# Altium PCB project_13.PcbDoc
Units mil, origin at the board's own origin, x right, y up, seen from the top; angles counter-clockwise.
Board outline 2697.9 x 2392.9 mil, 2 copper layers (Top Layer, Bottom Layer); 18 components, 44 nets, 103 pads, 2 vias.
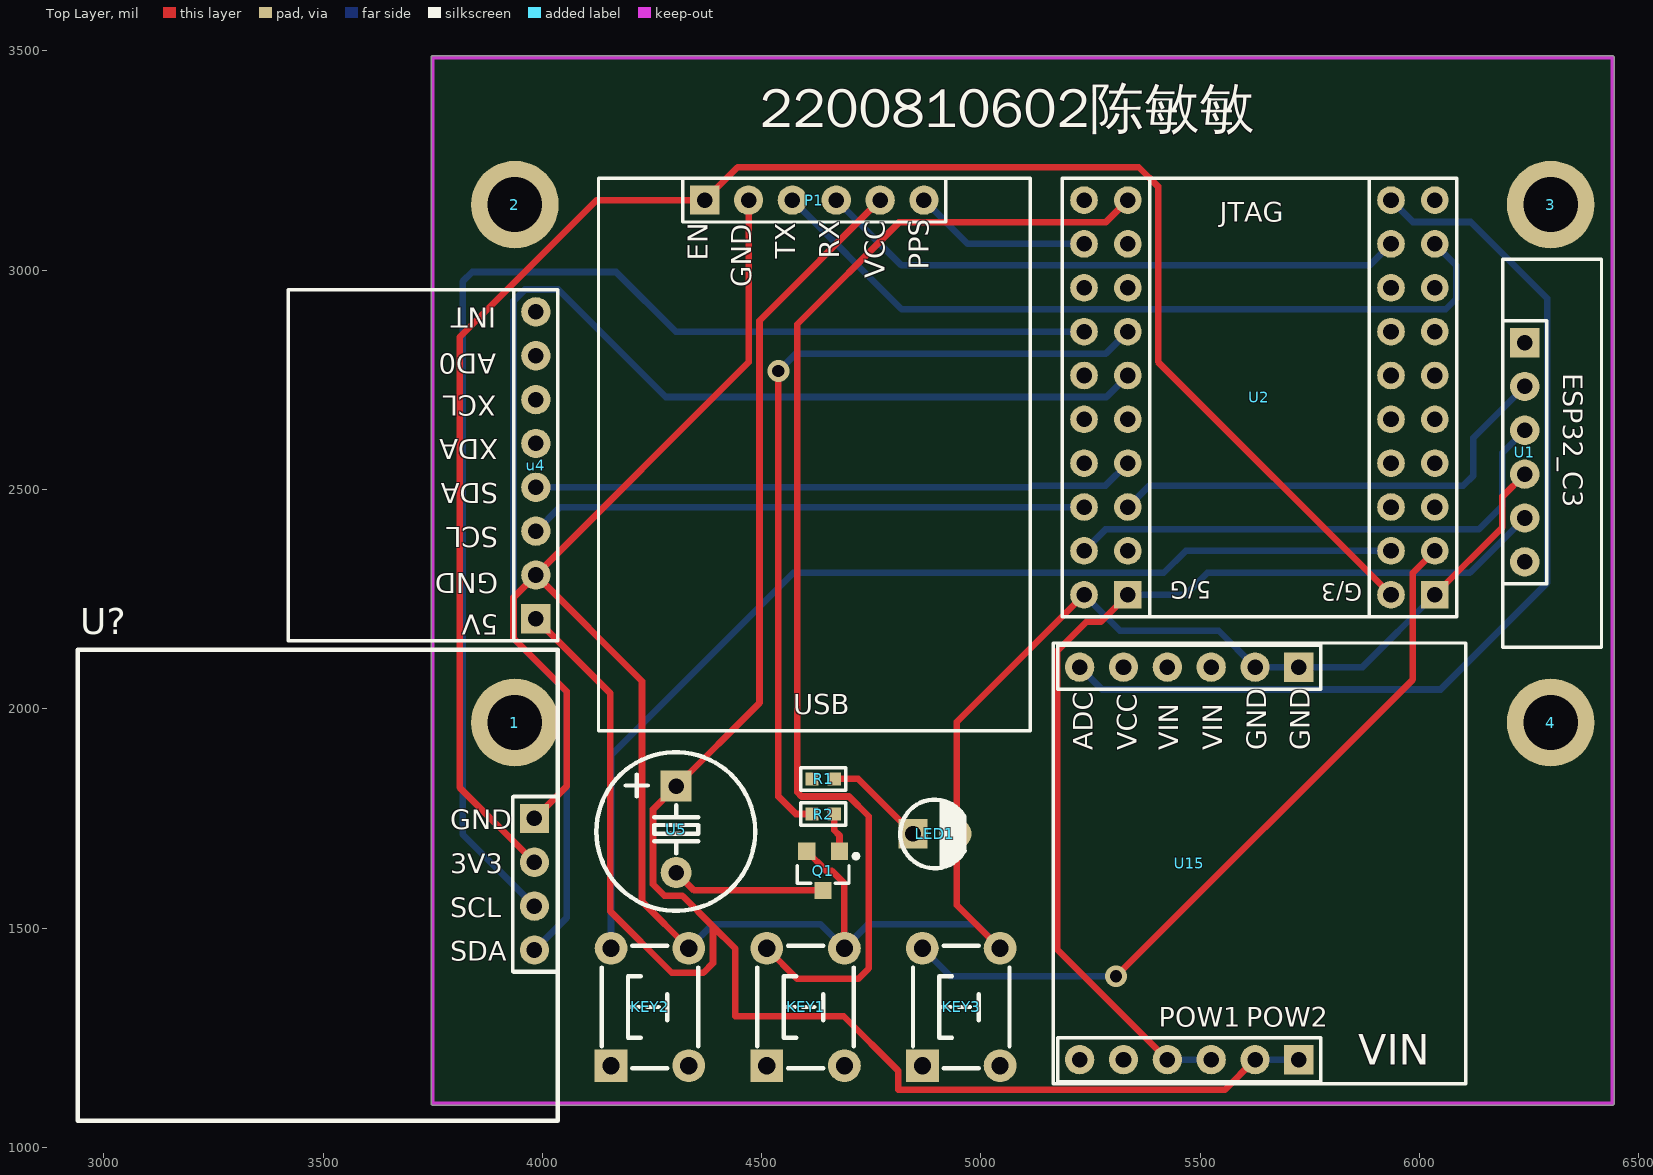
[diagram p0: Top Layer view]
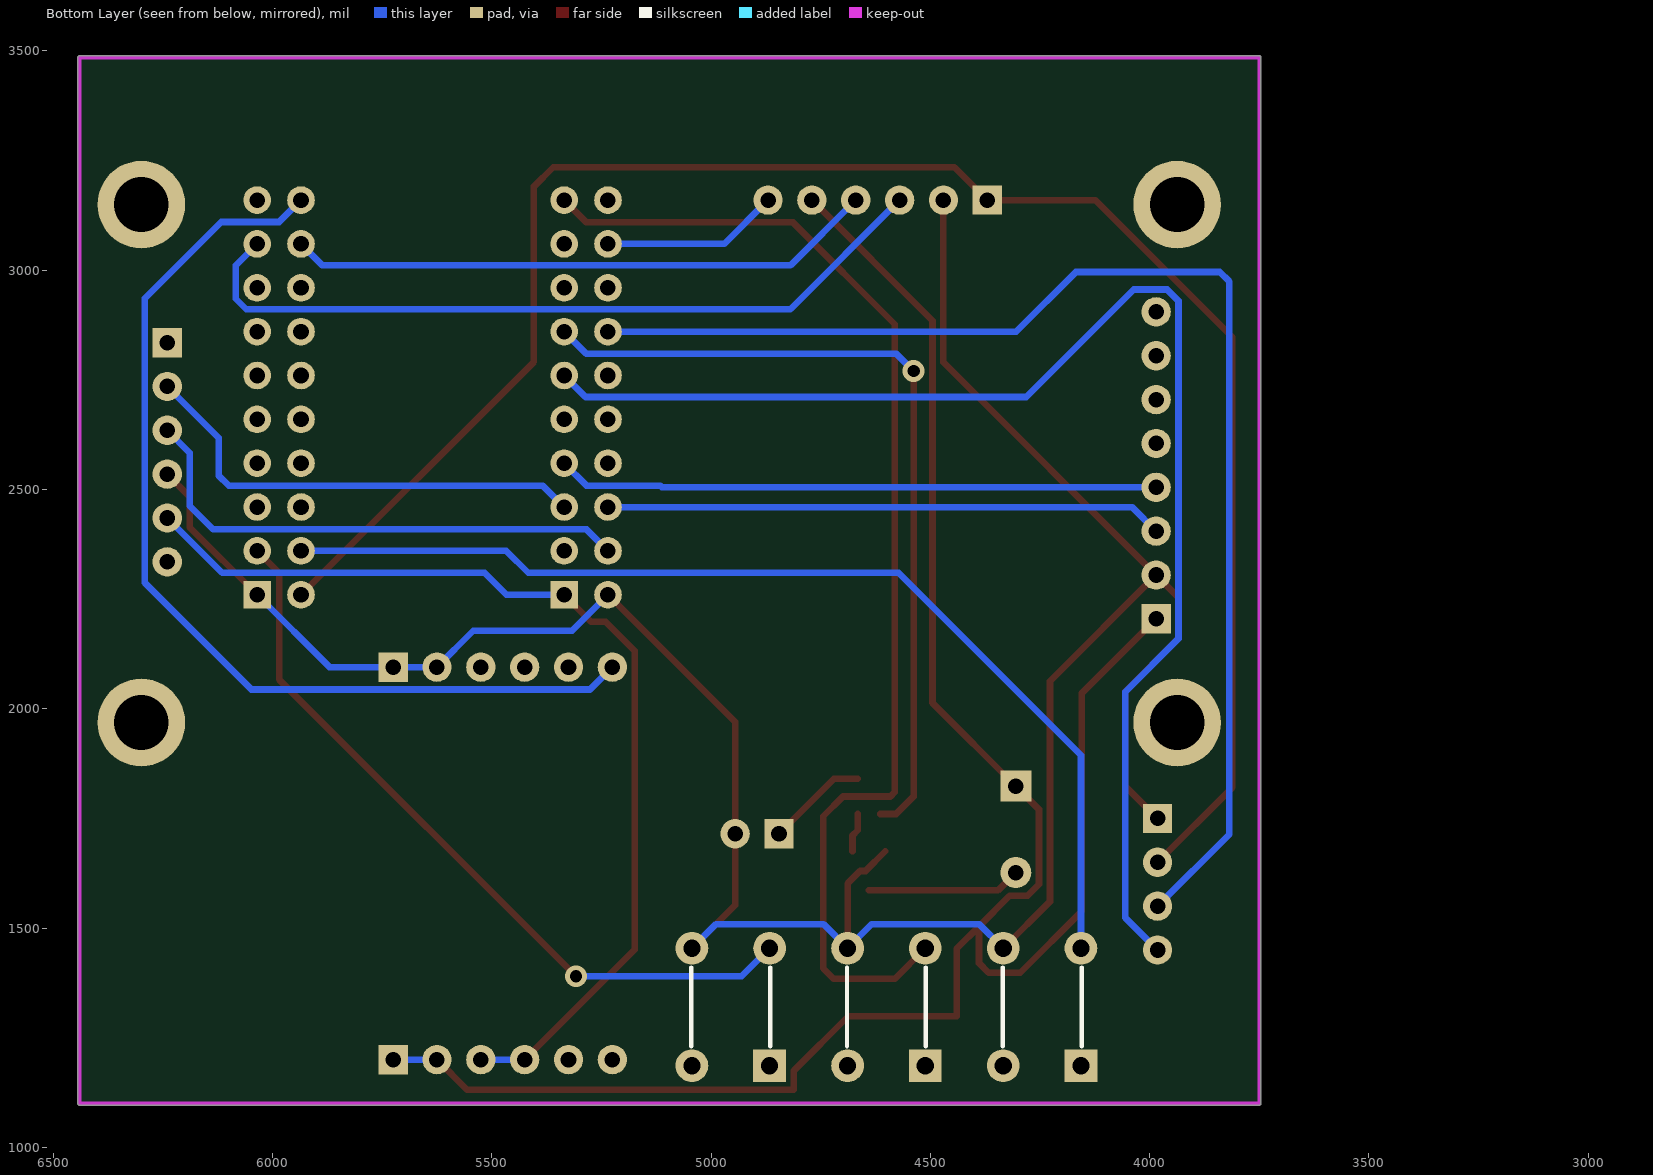
[diagram p1: Bottom Layer view, seen from below]

## Layer stack, top to bottom
Top Solder: solder mask 0.4, Solder Resist, Dk 3.5
Top Layer: signal copper 1.4
Dielectric 1: dielectric 12.6, FR-4, Dk 4.8
Bottom Layer: signal copper 1.4
Bottom Solder: solder mask 0.4, Solder Resist, Dk 3.5

## Board outline
3746.05,1100 ccw(c3750,1100) 3750,1096.05 6440,1096.05 ccw(c6440,1100) 6443.95,1100 6443.95,3485 ccw(c6440,3485) 6440,3488.95 3750,3488.95 ccw(c3750,3485) 3746.05,3485

## Design rules (kind name [scope] priority, off if disabled: settings)
Clearance [All] p1: gap=10 ignorepadtopadclearanceinfootprint=FALSE
PolygonConnect [All] p1: connectstyle=Relief reliefconductorwidth=10 reliefentries=4 polygonreliefangle="90 Angle" airgapwidth=10
RoutingVias [All] p1: holewidth=28 width=50 viastyle="Through Hole" minholewidth=28 minwidth=50 maxholewidth=28 maxwidth=50
SolderMaskExpansion [All] p1: expansion=4 istentingtop=FALSE
SupplyNets "Schematic Supply Nets_3" [InNet('5V_MCU')] p1: voltage=0.000
SupplyNets "Schematic Supply Nets_2" [InNet('3V3')] p2: voltage=0.000
SupplyNets "Schematic Supply Nets_1" [InNet('5V')] p3: voltage=0.000
SupplyNets "Schematic Supply Nets" [InNet('GND')] p4: voltage=0.000
Width [All] p1: maxlimit=100 minlimit=10 preferedwidth=15 minimp=50.000000 maximp=50.000000 favimp=50.000000
30 further rules are at their usual default settings.

## Components (designator, comment, footprint, x,y, rotation, side; value= is the part's Value field where it differs from the comment)
1 "M3" "M3 125X200" 3937.01,1968.5 r90 top
2 "M3" "M3 125X200" 3937.01,3149.61 r90 top
3 "M3" "M3 125X200" 6299.21,3149.61 r90 top
4 "M3" "M3 125X200" 6299.21,1968.5 r90 top
KEY1 "mod_buttom" MOD_BUTTOM 4600,1310 r90 top
KEY2 "mod_buttom" MOD_BUTTOM 4245,1310 r90 top
KEY3 "mod_buttom" MOD_BUTTOM 4955,1310 r90 top
LED1 "红色" "LED 3MM-R" 4895,1715 r0 top
P1 "port_6p" MOD_GPS 4622.37,3166.24 r0 top
Q1 "SS8050" SOT23-3L 4640,1630 r180 top
R1 "1K" "R 0603_L" 4640,1840 r0 top
R2 "1K" "R 0603_L" 4640,1760 r0 top
U1 "c3_hw_1" C3_HW_1 6240,2585 r270 top
U2 "f1_hw_1_gw" F1_HW_1_GW 5645,2725 r270 top
u4 "mod_mpu6050" MOD_MPU6050 3869.75,2380.98 r180 top
U5 "mod_buzzer" MOD_BUZZER 4300,1720 r90 top
U15 "pow_hw_3" POW_HW_3 5500,1760 r0 top
U? "mod_oled" mod_oled 3980,1595 r270 top

## Footprints (in the part's own frame and the unit in brackets; to place one, negate y for a bottom-side part, rotate by r counter-clockwise, add the part's x,y. Pads: shape width x height; smd on the part's side, far side on the other; paste and mask are expansions set on the pad)
C3_HW_1 [mm]
  rect 1.7x1.7 hole 0.9: 1(-6.35,0)
  round 1.7 hole 0.9: 2(-3.81,0) 3(-1.27,0) 4(1.27,0) 5(3.81,0) 6(6.35,0)
  silkscreen extent -11.18,-1.27 11.3,4.45, body extent -11.18,-1.27 11.3,4.45, height 8.5
F1_HW_1_GW [mm]
  rect 1.6x1.6 hole 0.9: 1(11.811,9.906) 21(11.811,-7.874)
  round 1.6 hole 0.9: 2(11.811,7.366) 3(9.271,9.906) 4(9.271,7.366) 5(6.731,9.906) 6(6.731,7.366) 7(4.191,9.906) 8(4.191,7.366) 9(1.651,9.906) 10(1.651,7.366) 11(-0.889,9.906) 12(-0.889,7.366) 13(-3.429,9.906) 14(-3.429,7.366) 15(-5.969,9.906) 16(-5.969,7.366) 17(-8.509,9.906) 18(-8.509,7.366) 19(-11.049,9.906) 20(-11.049,7.366) 22(11.811,-10.414) 23(9.271,-7.874) 24(9.271,-10.414) 25(6.731,-7.874) 26(6.731,-10.414) 27(4.191,-7.874) 28(4.191,-10.414) 29(1.651,-7.874) 30(1.651,-10.414) 31(-0.889,-7.874) 32(-0.889,-10.414) 33(-3.429,-7.874) 34(-3.429,-10.414) 35(-5.969,-7.874) 36(-5.969,-10.414) 37(-8.509,-7.874) 38(-8.509,-10.414) 39(-11.049,-7.874) 40(-11.049,-10.414)
  silkscreen extent -12.32,-11.68 13.08,11.18, body extent -12.38,-11.68 13.08,11.18, height 8.5
"LED 3MM-R" [mm] "红色3mm直插LED"
  rect 1.7x1.7 hole 0.9: 1(-1.27,0)
  round 1.7 hole 0.9: 2(1.27,0)
  silkscreen extent -2.01,-2 1.72,1.98, body extent -1.95,-1.95 1.64,1.95, height 5.55
"M3 125X200" [mil] "M3螺丝孔，孔125Mil，焊盘200Mil"
  round 200 hole 125: 1(0,0)
MOD_BUTTOM [mm]
  rect 1.9x1.9 hole 1: 1(-3.146,2.25)
  round 1.9 hole 1: 2(-3.146,-2.25) 3(3.654,-2.25) 4(3.654,2.25)
  silkscreen extent -3.3,-2.79 3.81,2.79, body extent -3.85,-3 4.36,3, height 4.25
MOD_BUZZER [mm] "有源蜂鸣器"
  rect 1.8x1.8 hole 0.9: 1(2.627,-0.127)
  round 1.8 hole 0.9: 2(-2.373,-0.127)
  silkscreen extent -4.6,-4.7 4.6,4.5, body extent -4.37,-4.63 4.63,4.37, height 5.45
MOD_GPS [mm] "GPS模块"
  rect 1.7x1.7 hole 0.9: 1(-6.41,-0.158)
  round 1.7 hole 0.9: 2(-3.87,-0.158) 3(-1.33,-0.158) 4(1.21,-0.158) 5(3.75,-0.158) 6(6.29,-0.158)
  silkscreen extent -12.56,-30.89 12.44,1.11, body extent -7.68,-1.43 7.56,1.11, height 8.5
MOD_MPU6050 [mm]
  rect 1.7x1.7 hole 0.9: 1(-2.927,4.47)
  round 1.7 hole 0.9: 2(-2.927,1.93) 3(-2.927,-0.61) 4(-2.927,-3.15) 5(-2.927,-5.69) 6(-2.927,-8.23) 7(-2.927,-10.77) 8(-2.927,-13.31)
  silkscreen extent -4.2,-14.61 11.41,5.74, body extent -4.2,-14.58 -1.66,5.74, height 8.5
mod_oled [mm] "外购屏幕模块接口"
  rect 1.7x1.7 hole 0.9: 1(-3.935,0.047)
  round 1.7 hole 0.9: 2(-1.395,0.047) 3(1.145,0.047) 4(3.685,0.047)
  silkscreen extent -13.72,-26.4 13.58,1.4, body extent -13.72,-26.42 13.59,1.4, height 8.5
POW_HW_3 [mm]
  round 1.7 hole 0.9: 0(3.175,8.509) 1(-1.905,8.509) 1(0.635,8.509) 2(-4.445,8.509) 3(-6.985,-14.224) 3(-4.445,-14.224) 4(3.175,-14.224) 5(-1.905,-14.224) 5(0.635,-14.224) 6(-6.985,8.509)
  rect 1.7x1.7 hole 0.9: 0(5.715,8.509) 4(5.715,-14.224)
  silkscreen extent -8.51,-15.62 15.37,9.91, body extent -8.51,-15.62 15.37,9.91, height 8.5
"R 0603_L" [mil] "1/10W贴片电阻"
  rect 30x30 smd: 1(-25.59,0) 2(25.59,0)
  silkscreen extent -51,-26 51,26, body extent -31,-16 32,16, height 16
SOT23-3L [mm] "3x1.3x1mm(长宽高)"
  rect 1x1 smd: 1(-0.95,-1.143) 2(0.95,-1.143) 3(0,1.125)
  silkscreen extent -2.03,-0.99 1.5,0.7, body extent -1.5,-1.2 1.5,1.2, height 1.05

## Part data
1 2 3 4: library part prot_m3, "m3铜柱孔", BOM名称=铜柱孔, 学习资源=www.ooocke.com, 版权归属=源创客
KEY1 KEY2 KEY3: "6*6*4.3按键"
LED1: library part LED-3MM, "插件LED", BOM名称=插件LED, 学习资源=www.ooocke.com, 版权归属=源创客
P1: "6P模块接口"
Q1: library part 8050-SMD, "高频放大-NPN型", BOM名称=高频放大-NPN型, 学习资源=www.ooocke.com, 属性="40V 1.5A 1W 100MHZ", 版权归属=源创客
R1 R2: library part R, "贴片电阻", BOM名称=贴片电阻, 学习资源=www.ooocke.com, 版权归属=源创客
U1: "ESP32C3蓝牙模块 / 6p排母"
u4: "陀螺仪模块"
U5: "有源蜂鸣器"
U15: "两路降压电源模块"
U?: "oled模块 / 4p排母"

## Via types
v1: diameter 50, hole 28, Top Layer to Bottom Layer, 2 vias

## Nets (pads, with @x,y where several pads share a name; then routed paths per layer and width w, separated by ;. In a path a pad name is that pad's centre, name@x,y a point inside that pad or via, vN(x,y) a via of type N, cw(c..) or ccw(c..) an arc to the next point about the centre after c; other vN are vias at no path point)
3V3: P1.1 U2.2 U?.2 | length 4190.7
  Top Layer w15: U?.2 3811,1820.76 3811,2847 4124,3160 P1.1 4445,3235 5360,3235 5404,3191 5404,2791 U2.2
5V: P1.5 u4.1 U5.1 U15.4 | length 4708.5
  Top Layer w15: u4.1 4155,2035 4155,1538 4295,1398 4367,1398 4389,1420 4389,1503.77 ; P1.5 4495,2885 4495,2013.43 U5.1 4252.07,1770.49 4252.07,1600 4278.43,1573.64 4319.13,1573.64 4389,1503.77 ; U15.4@5625,1200 5556,1131 4811,1131 4811,1175 4687,1299 4440,1299 4440,1452.77 4389,1503.77
  Bottom Layer w15: U15.4@5625,1200 U15.4@5725,1200
5V_MCU: U1.5 U2.21 U15.5 | length 2327.5
  Top Layer w15: U2.21 5273,2198 5240,2198 5174,2132 5174,1451 U15.5@5425,1200
  Bottom Layer w15: U2.21 5466.5,2260 5516.5,2310 6115,2310 U1.5 ; U15.5@5425,1200 U15.5@5525,1200
BOOT0: U2.35
GND: KEY1.3 KEY2.3 KEY3.3 LED1.2 P1.2 Q1.2 U1.4 U2.1 U2.22 u4.2 U15.0 U?.1 | length 6037.1
  Top Layer w15: U?.1 4055,1823.06 4055,2040 3934,2161 3934,2254 u4.2 ; KEY2.3 4227.07,1560.37 4227.07,2062.93 u4.2 ; P1.2 4470,2790 u4.2 ; Q1.2 4647.6,1630 4660,1630 4688.58,1601.42 KEY1.3 ; KEY3.3 4945,1552.44 LED1.2 4945,1970 U2.22 ; U2.1 6189,2414 6189,2484 U1.4
  Bottom Layer w15: KEY2.3 4388.72,1509 4633.44,1509 KEY1.3 4743.72,1509 4988.44,1509 KEY3.3 ; U2.22 5317,2178 5542,2178 5625,2095 5725,2095 5870,2095 U2.1
NetLED1_1: LED1.1 R1.2 | length 231.2
  Top Layer w15: R1.2 4720,1840 LED1.1
NetQ1_1: Q1.1 R2.2 | length 89.9
  Top Layer w15: R2.2 4665.59,1722.81 4677.4,1711 Q1.1
NetQ1_3: Q1.3 U5.2 | length 351.9
  Top Layer w15: U5.2 4345.87,1585.71 Q1.3
NRST: U2.12
PA0: U2.20 U15.6 | length 2285.6
  Bottom Layer w15: U15.6 5276,2044 6048,2044 6291,2287 6291,2936 6117,3110 5985,3110 U2.20
PA1: U2.19
PA2: P1.4 U2.18 | length 1347
  Bottom Layer w15: P1.4 4819,3011 5886,3011 U2.18
PA3: P1.3 U2.17 | length 1772.4
  Bottom Layer w15: P1.3 4819,2911 6060,2911 6084,2935 6084,3011 U2.17
PA4: U2.16
PA5: U2.15
PA6: U2.14
PA7: U2.13
PA8: U2.23
PA9: U1.3 U2.24 | length 1189.8
  Bottom Layer w15: U2.24 5284,2409 6135,2409 6189,2463 6189,2584 U1.3
PA10: U1.2 U2.25 | length 1069.3
  Bottom Layer w15: U2.25 5384,2509 6100,2509 6123,2532 6123,2618 U1.2
PA11: U2.26 u4.3 | length 1272.8
  Bottom Layer w15: u4.3 4040,2460 U2.26
PA12: U2.27 u4.4 | length 1372.8
  Bottom Layer w15: u4.4 5112,2505 5116,2509 5284,2509 U2.27
PA13: U2.28
PA14: U2.29
PA15: U2.30
PB0: U2.11
PB1: U2.9
PB2: U2.10
PB3: U2.32
PB4: U2.31 U?.4 | length 3094.1
  Bottom Layer w15: U?.4 4055,1523.06 4055,2039 3934,2160 3934,2930 3960,2956 4036,2956 4281,2711 5286,2711 U2.31
PB5: U2.34 U?.3 | length 2974.4
  Bottom Layer w15: U?.3 3818,1713.76 3818,2974 3840,2996 4168,2996 4304,2860 U2.34
PB6: R2.1 U2.33 | length 1897.3
  Top Layer w15: v1(4538,2770) 4538,1800 4578,1760 R2.1
  Bottom Layer w15: v1(4538,2770) 4578,2810 5285,2810 U2.33
PB7: U2.36
PB8: P1.6 U2.38 | length 406.4
  Bottom Layer w15: P1.6 4970,3060 U2.38
PB9: U2.37
PB10: U2.7
PB11: U2.8
PB12: U2.5
PB13: U2.6
PB14: KEY3.4 U2.3 | length 1739.2
  Top Layer w15: v1(5308,1390) 5985,2067 5985,2310 U2.3
  Bottom Layer w15: KEY3.4 4930.28,1390 v1(5308,1390)
PB15: KEY2.4 U2.4 | length 2411.8
  Bottom Layer w15: KEY2.4 4156.42,1894 4572.42,2310 5417,2310 5467,2360 U2.4
PC13: KEY1.4 U2.39 | length 2742.5
  Top Layer w15: KEY1.4 4581.28,1384 4720,1384 4744,1408 4744,1755 4699,1800 4591,1800 4581,1810 4581,2877 4813,3109 5284,3109 U2.39
USER_IO_8/LED_R: R1.1
VBAT: U2.40
pads on no net: 1.1 2.1 3.1 4.1 KEY1.1 KEY1.2 KEY2.1 KEY2.2 KEY3.1 KEY3.2 U1.1 U1.6 u4.5 u4.6 u4.7 u4.8 U15.1 U15.2 U15.3

## Keep-outs
Keep-Out Layer:
  lines w7.87: 3750,3230 3750,3485 6440,3485 6440,3255 6440,1100 3750,1100 3750,3260

## Silkscreen, mask and mechanical layers (free items; w line width, h text height)
Top Overlay:
  text "2200810602陈敏敏" at 4495,3295 h157.48

## Text inside footprints (layer, text, board x,y; h text height)
P1: Top Overlay "USB" at 4572.43,1971.95 h78.74; Top Overlay "GND" at 4491.66,2961.29 h78.74 r90; Top Overlay "TX" at 4592.37,3026.29 h78.74 r90; Top Overlay "PPS" at 4896.66,3001.24 h78.74 r90; Top Overlay "VCC" at 4796.66,2981.29 h78.74 r90; Top Overlay "EN" at 4392.37,3021.24 h78.74 r90; Top Overlay "RX" at 4692.37,3026.24 h78.74 r90
U1: Top Overlay "ESP32_C3" at 6327.5,2765 h45 r270
U2: Top Overlay "JTAG" at 5545,3110 h45; Top Overlay "G/3" at 5870,2285 h39.37 r180; Top Overlay "5/G" at 5525,2290 h39.37 r180
u4: Top Overlay "INT" at 3894.75,2930.98 h78.74 r180; Top Overlay "AD0" at 3894.7,2825.27 h78.74 r180; Top Overlay "XCL" at 3894.7,2730.27 h78.74 r180; Top Overlay "XDA" at 3899.7,2630.98 h78.74 r180; Top Overlay "SDA" at 3899.7,2530.27 h78.74 r180; Top Overlay "SCL" at 3899.7,2430.27 h78.74 r180; Top Overlay "GND" at 3899.7,2325.27 h78.74 r180; Top Overlay "5V" at 3899.7,2230.27 h78.74 r180
U15: Top Overlay "VIN" at 5860.08,1165 h118.11; Top Overlay "VCC" at 5355,1905 h45 r90; Top Overlay "ADC" at 5255,1905 h45 r90; Top Overlay "VIN" at 5550,1905 h45 r90; Top Overlay "VIN" at 5450,1905 h45 r90; Top Overlay "GND" at 5750,1905 h45 r90; Top Overlay "GND" at 5650,1905 h45 r90; Top Overlay "POW2" at 5605,1275 h45; Top Overlay "POW1" at 5405,1275 h45
U?: Top Overlay "3V3" at 3790,1625 h45; Top Overlay "SCL" at 3790,1525 h45; Top Overlay "SDA" at 3790,1425 h45; Top Overlay "GND" at 3790,1725 h45